# Altium PCB carrier_board.PcbDoc (part 16 of 18)
Units mm, origin at the board's own origin, x right, y up, seen from the top; angles counter-clockwise.
Board outline 146 x 102 mm, 20 copper layers (F.Cu, F.Mask, B.Cu, B.Mask, In1.Cu, F.SilkS, In2.Cu, B.SilkS, F.Adhes, B.Adhes, F.Paste, B.Paste, Dwgs.User, Cmts.User, Eco1.User, Eco2.User, Edge.Cuts, Margin, B.CrtYd, F.CrtYd); 256 components, 384 nets, 1262 pads, 1024 vias.
Unrouted connection lines stored in the file: 117.
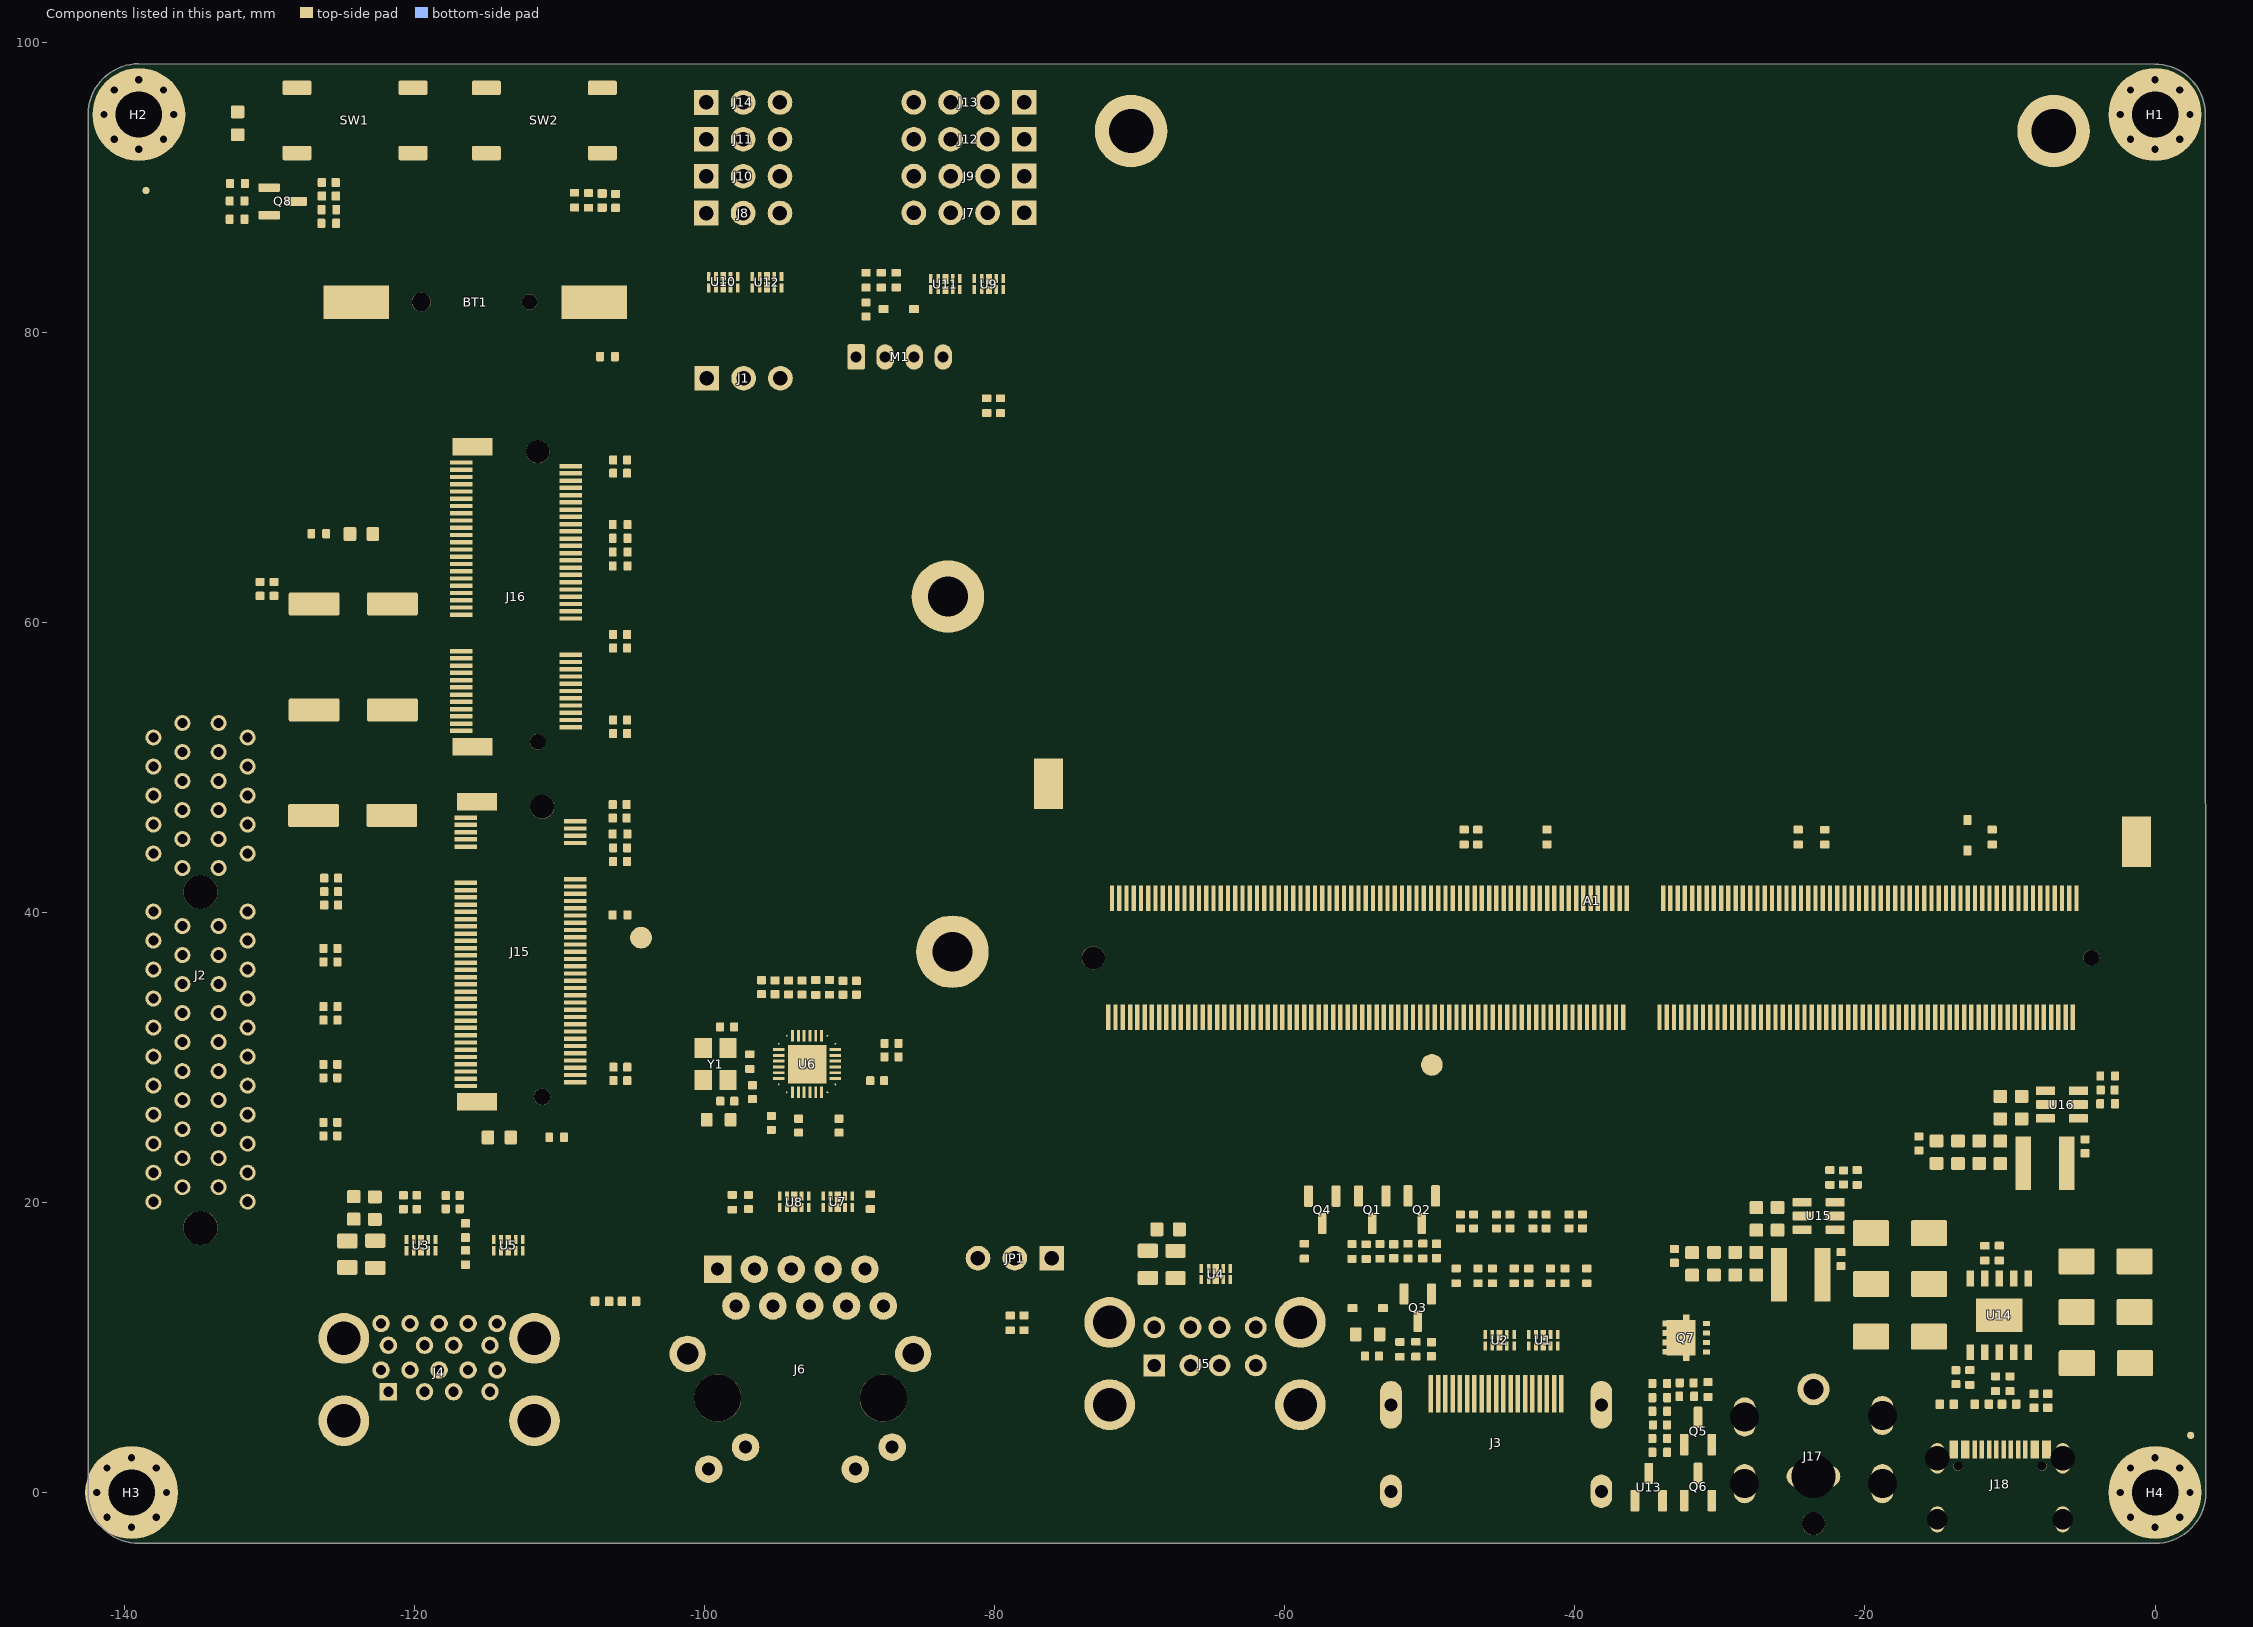
[diagram p26: the components of this part, seen from the top]

## Polygon pours and split planes (outlines as drawn) (continued)
MDI3+ on F.Cu "F.Cu-/Gigabit Ethernet/MDI3+" (solid, remove dead copper, pour order 31023): 25 vertices, not listed, extent -91.005,12.859 -89.425,14.292
CON_USB4_D_N on F.Cu "F.Cu-/USB2.0&USB3.0/CON_USB4_D_N-2" (solid, remove dead copper, pour order 31409): -115.932,17.355 -116.012,17.392 -116.055,17.429 -116.094,17.476 -116.126,17.531 -116.15,17.593 -116.162,17.656 -116.163,17.723 -116.162,17.739 -116.481,17.58 -116.559,17.285 -116.419,17.284 -116.203,17.248 -116.044,17.211 -115.932,17.185
I2C5_SDA on F.Cu "F.Cu-/GPIO/I2C5_SDA" (solid, remove dead copper, pour order 32144): -81.475,83.37 -81.475,83.355 -81.479,83.285 -81.494,83.257 -81.525,83.245 -81.4,82.932 -81.275,83.245 -81.296,83.25 -81.311,83.262 -81.325,83.307 -81.325,83.355 -81.325,83.37
CON_USB4_D_N on F.Cu "F.Cu-/USB2.0&USB3.0/CON_USB4_D_N-1" (solid, remove dead copper, pour order 31410): -117.017,17.185 -116.86,17.219 -116.619,17.269 -116.502,17.285 -116.4,17.285 -116.479,17.58 -116.798,17.736 -116.8,17.615 -116.838,17.505 -116.906,17.416 -116.948,17.383 -116.991,17.362 -117.017,17.355
{\C\L\K\R\E\Q\M\}\ on F.Cu "F.Cu-/M.2 E&M Key/~{CLKREQM}" (solid, remove dead copper, pour order 31583): -106.44,40.41 -106.446,40.325 -106.467,40.224 -106.493,40.159 -106.531,40.103 -106.562,40.075 -106.6,40.057 -106.34,39.819 -106.08,40.057 -106.142,40.096 -106.192,40.171 -106.228,40.287 -106.24,40.41
Net-(J3-+5V) on F.Cu "F.Cu-Net-(J3-+5V)" (solid, remove dead copper, pour order 31312): -49.303,5.355 -49.31,5.396 -49.32,5.468 -49.31,5.495 -49.28,5.505 -49.43,6.806 -49.58,5.505 -49.558,5.5 -49.545,5.488 -49.54,5.445 -49.55,5.396 -49.557,5.355
SUSCLK_WIFI on F.Cu "F.Cu-/LattePanda Module/SUSCLK_WIFI-1" (solid, remove dead copper, pour order 31642): -104.78,45.5 -104.85,45.506 -104.933,45.525 -104.993,45.551 -105.042,45.588 -105.067,45.621 -105.081,45.66 -105.083,45.67 -105.321,45.4 -105.083,45.13 -105.056,45.195 -104.997,45.247 -104.899,45.285 -104.78,45.3
+3V3 on F.Cu "F.Cu-+3V3-21" (solid, remove dead copper, pour order 31362): -106.53,47.09 -106.525,47.01 -106.518,46.914 -106.522,46.816 -106.548,46.73 -106.574,46.696 -106.61,46.67 -106.33,46.499 -106.05,46.67 -106.104,46.717 -106.134,46.793 -106.142,46.908 -106.135,47.01 -106.13,47.09
+3V3 on F.Cu "F.Cu-+3V3-20" (solid, remove dead copper, pour order 31272): -49.785,12.65 -49.78,12.726 -49.762,12.816 -49.735,12.894 -49.697,12.964 -49.662,13.004 -49.62,13.033 -49.596,13.043 -49.885,13.688 -50.174,13.043 -50.106,13.002 -50.049,12.924 -50.005,12.804 -49.985,12.65
GND on F.Cu "F.Cu-GND-44" (solid, remove dead copper, pour order 31875): -12.815,41.995 -12.81,42.07 -12.798,42.125 -12.77,42.192 -12.74,42.256 -12.714,42.352 -12.91,42.392 -13.106,42.352 -13.065,42.216 -13.056,42.195 -13.027,42.115 -13.015,41.995
Net-(U14-VDD) on F.Cu "F.Cu-Net-(U14-VDD)" (solid, remove dead copper, pour order 31478): -13.15,8.565 -13.242,8.568 -13.354,8.584 -13.407,8.6 -13.455,8.624 -13.492,8.656 -13.516,8.699 -13.741,8.43 -13.516,8.161 -13.478,8.224 -13.406,8.272 -13.293,8.304 -13.15,8.315
GND on F.Cu "F.Cu-GND-43" (solid, remove dead copper, pour order 31704): -54.339,15.509 -54.307,15.65 -54.274,15.726 -54.23,15.793 -54.194,15.827 -54.153,15.849 -54.129,15.854 -54.389,16.098 -54.669,15.866 -54.583,15.836 -54.52,15.778 -54.485,15.699 -54.481,15.651
FAN_1_PWM on F.Cu "F.Cu-/Fan_Temp/FAN_1_PWM" (solid, remove dead copper, pour order 31861): -71.369,43.199 -71.311,43.251 -71.262,43.282 -71.198,43.309 -71.134,43.335 -71.049,43.384 -71.159,43.551 -71.326,43.661 -71.391,43.539 -71.401,43.512 -71.435,43.434 -71.511,43.341
GND on F.Cu "F.Cu-GND-42" (solid, remove dead copper, pour order 31306): -105.046,47.066 -105.097,47.011 -105.168,46.934 -105.251,46.862 -105.344,46.813 -105.394,46.805 -105.446,46.81 -105.371,46.499 -105.09,46.377 -105.075,46.46 -105.021,46.549 -104.918,46.652 -104.849,46.71 -104.764,46.784
+BATT on F.Cu "F.Cu-+BATT-1" (solid, remove dead copper, pour order 31984): -60.543,62.537 -60.498,62.485 -60.471,62.441 -60.445,62.362 -60.425,62.29 -60.376,62.199 -60.209,62.309 -60.099,62.476 -60.209,62.531 -60.262,62.545 -60.342,62.572 -60.386,62.599 -60.437,62.643
DDI_B_TX2+ on F.Cu "F.Cu-/HDMI/DDI_B_TX2+" (solid, remove dead copper, pour order 31453): -44.891,19.683 -44.869,19.612 -44.802,19.37 -44.784,19.248 -44.792,19.142 -44.482,19.169 -44.324,19.45 -44.441,19.463 -44.547,19.511 -44.634,19.588 -44.665,19.635 -44.685,19.68 -44.686,19.683
HSIO_10_TX- on F.Cu "F.Cu-/LattePanda Module/HSIO_10_TX-" (solid, remove dead copper, pour order 31900): -59.864,29.651 -59.873,29.486 -59.879,29.385 -59.86,29.241 -59.664,29.279 -59.498,29.391 -59.569,29.473 -59.587,29.488 -59.642,29.548 -59.658,29.59 -59.663,29.651
GND on F.Cu "F.Cu-GND-41" (solid, remove dead copper, pour order 31871): -49.515,40.236 -49.52,40.16 -49.532,40.105 -49.56,40.039 -49.59,39.974 -49.616,39.879 -49.42,39.839 -49.224,39.879 -49.265,40.015 -49.274,40.036 -49.303,40.115 -49.315,40.236
Net-(U13-REF) on F.Cu "F.Cu-Net-(U13-REF)-1" (solid, remove dead copper, pour order 31569): -33.54,2.183 -33.534,2.267 -33.513,2.368 -33.487,2.434 -33.449,2.489 -33.418,2.517 -33.38,2.536 -33.64,2.773 -33.9,2.536 -33.838,2.497 -33.788,2.422 -33.752,2.306 -33.74,2.183
+3V3 on F.Cu "F.Cu-+3V3-19" (solid, remove dead copper, pour order 31811): -124.986,87.38 -124.908,87.375 -124.852,87.363 -124.787,87.337 -124.723,87.309 -124.629,87.284 -124.589,87.48 -124.629,87.676 -124.761,87.635 -124.787,87.623 -124.866,87.593 -124.986,87.58
CON_PCIE_TX_0- on F.Cu "F.Cu-/M.2 E&M Key/CON_PCIE_TX_0-" (solid, remove dead copper, pour order 31527): -106.803,58.736 -106.621,58.8 -106.512,58.828 -106.403,58.846 -106.328,58.849 -106.262,58.84 -106.299,59.15 -106.58,59.301 -106.593,59.178 -106.641,59.06 -106.721,58.961 -106.803,58.906
Net-(D10-A2) on F.Cu "F.Cu-Net-(D10-A2)-2" (solid, remove dead copper, pour order 31429): -11.34,5.475 -11.334,5.56 -11.314,5.662 -11.288,5.737 -11.251,5.801 -11.217,5.835 -11.177,5.859 -11.171,5.861 -11.455,6.091 -11.739,5.861 -11.668,5.82 -11.608,5.743 -11.562,5.626 -11.54,5.487 -11.54,5.475
GND on F.Cu "F.Cu-GND-40" (solid, remove dead copper, pour order 31746): -116.156,63.41 -116.073,63.405 -116.013,63.393 -115.954,63.371 -115.89,63.347 -115.799,63.324 -115.759,63.52 -115.799,63.716 -115.924,63.676 -115.96,63.658 -116.037,63.624 -116.156,63.61
{\W\A\K\E\}\ on F.Cu "F.Cu-/~{WAKE}" (solid, remove dead copper, pour order 31775): -46.565,34.174 -46.56,34.255 -46.548,34.312 -46.524,34.374 -46.498,34.438 -46.474,34.531 -46.67,34.571 -46.866,34.531 -46.826,34.403 -46.81,34.371 -46.779,34.293 -46.765,34.174
GND on F.Cu "F.Cu-GND-39" (solid, remove dead copper, pour order 31796): -24.815,41.994 -24.81,42.075 -24.798,42.132 -24.774,42.194 -24.748,42.258 -24.724,42.351 -24.92,42.391 -25.116,42.351 -25.076,42.223 -25.06,42.191 -25.029,42.113 -25.015,41.994
GND on F.Cu "F.Cu-GND-38" (solid, remove dead copper, pour order 31691): -96.175,35.82 -96.181,35.761 -96.199,35.692 -96.225,35.638 -96.263,35.59 -96.3,35.563 -96.345,35.545 -96.355,35.542 -96.075,35.319 -95.795,35.542 -95.87,35.576 -95.926,35.64 -95.964,35.735 -95.975,35.82
+5V on F.Cu "F.Cu-+5V-2" (solid, remove dead copper, pour order 31191): 19 vertices, not listed, extent -69.275,17.215 -68.449,18.191
+3V3 on F.Cu "F.Cu-+3V3-18" (solid, remove dead copper, pour order 30976): -125.8,40.1 -125.8,48.8 -134.7,48.8 -134.7,47 -138.68,46.99 -138.68,44.09 -130.5,44.1 -129.1,44.1 -129.1,40.1
REFCLK3+ on F.Cu "F.Cu-/LattePanda Module/REFCLK3+" (solid, remove dead copper, pour order 31484): -115.845,64.209 -116.153,64.188 -116.444,64.163 -116.78,64.16 -116.771,64.01 -115.995,63.954 -115.99,63.982 -115.978,64.003 -115.932,64.03 -115.846,64.039 -115.845,64.039
Net-(D21-A2) on F.Cu "F.Cu-Net-(D21-A2)-1" (solid, remove dead copper, pour order 31699): -126.52,90.814 -126.514,90.729 -126.524,90.676 -126.547,90.623 -126.576,90.584 -126.615,90.553 -126.657,90.534 -126.387,90.309 -126.149,90.579 -126.214,90.609 -126.289,90.684 -126.37,90.815 -126.414,90.92
GND on F.Cu "F.Cu-GND-37" (solid, remove dead copper, pour order 31577): -25.194,45.6 -25.109,45.594 -25.008,45.573 -24.943,45.547 -24.887,45.509 -24.859,45.478 -24.841,45.44 -24.603,45.7 -24.841,45.96 -24.88,45.898 -24.955,45.848 -25.071,45.812 -25.194,45.8
TMDS_D2- on F.Cu "F.Cu-/HDMI/TMDS_D2-" (solid, remove dead copper, pour order 32078): -41.783,10.547 -41.778,10.515 -41.77,10.454 -41.78,10.431 -41.805,10.422 -41.68,10.109 -41.555,10.422 -41.575,10.427 -41.586,10.44 -41.589,10.482 -41.582,10.515 -41.577,10.547
CON_USB4_D_P on F.Cu "F.Cu-/USB2.0&USB3.0/CON_USB4_D_P-1" (solid, remove dead copper, pour order 31918): -115.903,16.913 -115.852,16.908 -115.815,16.895 -115.769,16.851 -115.752,16.826 -115.714,16.772 -115.651,16.717 -115.539,16.883 -115.501,17.079 -115.606,17.095 -115.68,17.097 -115.741,17.092 -115.903,17.083
+3V3 on F.Cu "F.Cu-+3V3-17" (solid, remove dead copper, pour order 31619): -107.995,45.905 -108.035,45.898 -108.108,45.889 -108.134,45.9 -108.145,45.93 -108.921,45.78 -108.145,45.63 -108.14,45.652 -108.128,45.665 -108.085,45.671 -108.035,45.662 -107.995,45.655
+BATT on F.Cu "F.Cu-+BATT" (solid, remove dead copper, pour order 31511): -105.686,77.922 -105.789,78.054 -105.839,78.143 -105.88,78.24 -105.902,78.319 -105.91,78.398 -105.91,78.422 -106.181,78.311 -106.242,77.99 -106.143,77.993 -106.02,77.961 -105.882,77.888 -105.792,77.816
Net-(U6-CKXTAL2) on F.Cu "F.Cu-Net-(U6-CKXTAL2)-1" (solid, remove dead copper, pour order 31555): -96.338,29.511 -96.574,29.491 -96.767,29.471 -96.937,29.47 -96.881,29.2 -96.564,29.044 -96.558,29.153 -96.518,29.247 -96.448,29.32 -96.406,29.345 -96.364,29.359 -96.338,29.361
GND on F.Cu "F.Cu-GND-36" (solid, remove dead copper, pour order 31433): 42 vertices, not listed, extent -83.879,92.8 -82.551,93.8
GND on F.Cu "F.Cu-GND-35" (solid, remove dead copper, pour order 31807): -54.565,33.794 -54.56,33.875 -54.548,33.932 -54.524,33.994 -54.498,34.058 -54.474,34.151 -54.67,34.191 -54.866,34.151 -54.826,34.023 -54.81,33.991 -54.779,33.913 -54.765,33.794
REFCLK0+ on F.Cu "F.Cu-/LattePanda Module/REFCLK0+" (solid, remove dead copper, pour order 31973): -49.737,38.725 -49.616,38.833 -49.543,38.899 -49.456,39.011 -49.622,39.123 -49.819,39.161 -49.822,39.064 -49.813,39.013 -49.805,38.972 -49.806,38.932 -49.821,38.891 -49.858,38.845
GND on F.Cu "F.Cu-GND-34" (solid, remove dead copper, pour order 31709): -95.325,24.51 -95.304,24.606 -95.278,24.659 -95.24,24.706 -95.201,24.736 -95.155,24.756 -95.131,24.761 -95.4,25.001 -95.669,24.761 -95.592,24.731 -95.529,24.669 -95.486,24.578 -95.475,24.51
HSIO_1_TX+ on F.Cu "F.Cu-/LattePanda Module/HSIO_1_TX+" (solid, remove dead copper, pour order 31536): -116.375,20.241 -116.457,20.293 -116.5,20.338 -116.539,20.394 -116.569,20.455 -116.59,20.524 -116.6,20.633 -116.881,20.48 -116.916,20.17 -116.809,20.179 -116.649,20.156 -116.436,20.093 -116.375,20.071
CON_USB2_D_P on F.Cu "F.Cu-/USB2.0&USB3.0/CON_USB2_D_P" (solid, remove dead copper, pour order 32065): -65.449,15.118 -65.433,15.004 -65.417,14.937 -65.387,14.802 -65.375,14.663 -65.25,14.679 -65.202,14.992 -65.231,14.997 -65.252,15.01 -65.274,15.052 -65.279,15.112 -65.279,15.118
PCIE30_TX2_P on F.Cu "F.Cu-/PCIe x4/PCIE30_TX2_P" (solid, remove dead copper, pour order 31524): -126.779,29.104 -126.733,29.119 -126.484,29.189 -126.353,29.21 -126.241,29.207 -126.279,29.517 -126.56,29.668 -126.569,29.542 -126.614,29.425 -126.688,29.33 -126.732,29.297 -126.776,29.276 -126.779,29.275
Net-(U13-K) on F.Cu "F.Cu-Net-(U13-K)" (solid, remove dead copper, pour order 31397): -35.012,6.011 -34.942,6.077 -34.852,6.148 -34.748,6.205 -34.694,6.222 -34.639,6.227 -34.598,6.222 -34.659,6.543 -34.93,6.654 -34.943,6.552 -34.994,6.434 -35.09,6.3 -35.191,6.191
GND on F.Cu "F.Cu-GND-33" (solid, remove dead copper, pour order 31611): -52.69,17.588 -52.676,17.551 -52.669,17.504 -52.673,17.456 -52.689,17.409 -52.713,17.376 -52.749,17.348 -52.799,17.326 -52.489,17.122 -52.253,17.401 -52.316,17.424 -52.393,17.492 -52.485,17.619 -52.548,17.73
TMDS_CK+ on F.Cu "F.Cu-/HDMI/TMDS_CK+-1" (solid, remove dead copper, pour order 31446): -47.163,14.812 -47.112,14.754 -47.06,14.677 -47.023,14.602 -46.999,14.522 -46.993,14.463 -46.999,14.405 -47.005,14.383 -46.684,14.429 -46.564,14.7 -46.665,14.716 -46.788,14.773 -46.93,14.877 -47.017,14.958
SOC_UART2_RX on F.Cu "F.Cu-/GPIO/SOC_UART2_RX" (solid, remove dead copper, pour order 32125): -98.285,83.493 -98.285,83.477 -98.289,83.407 -98.304,83.379 -98.335,83.367 -98.21,83.054 -98.085,83.367 -98.106,83.372 -98.121,83.385 -98.135,83.43 -98.135,83.477 -98.135,83.493
CON_USB4_SSRX_N on F.Cu "F.Cu-/USB2.0&USB3.0/CON_USB4_SSRX_N-1" (solid, remove dead copper, pour order 32028): -112.559,16.232 -112.559,16.238 -112.55,16.312 -112.527,16.344 -112.482,16.358 -112.53,16.671 -112.655,16.687 -112.667,16.548 -112.697,16.413 -112.719,16.316 -112.729,16.232
{\P\L\T\_\R\S\T\}\ on F.Cu "F.Cu-/~{PLT_RST}" (solid, remove dead copper, pour order 31866): -111.611,64.611 -111.669,64.559 -111.718,64.528 -111.782,64.501 -111.846,64.475 -111.931,64.426 -111.821,64.259 -111.654,64.149 -111.589,64.271 -111.579,64.298 -111.545,64.376 -111.469,64.469
Net-(A1-SIO_UART_RX) on F.Cu "F.Cu-Net-(A1-SIO_UART_RX)" (solid, remove dead copper, pour order 31856): -72.574,45.3 -72.652,45.305 -72.708,45.317 -72.773,45.343 -72.837,45.371 -72.931,45.396 -72.971,45.2 -72.931,45.004 -72.799,45.045 -72.773,45.057 -72.694,45.087 -72.574,45.1
TMDS_D2+ on F.Cu "F.Cu-/HDMI/TMDS_D2+-1" (solid, remove dead copper, pour order 31447): -39.663,14.812 -39.612,14.754 -39.56,14.677 -39.523,14.602 -39.499,14.522 -39.493,14.463 -39.499,14.405 -39.505,14.383 -39.184,14.429 -39.064,14.7 -39.165,14.716 -39.288,14.773 -39.43,14.877 -39.517,14.958
Net-(J6-CT) on F.Cu "F.Cu-Net-(J6-CT)" (solid, remove dead copper, pour order 31008): 27 vertices, not listed, extent -100.055,15.399 -98.155,16.85
GND on F.Cu "F.Cu-GND-32" (solid, remove dead copper, pour order 31879): -116.176,64.91 -116.103,64.905 -116.049,64.893 -115.98,64.862 -115.915,64.831 -115.819,64.804 -115.779,65 -115.819,65.196 -115.959,65.155 -115.974,65.149 -116.054,65.121 -116.176,65.11
Net-(Q8-G) on F.Cu "F.Cu-Net-(Q8-G)" (solid, remove dead copper, pour order 31507): -132.352,88.274 -132.472,88.184 -132.553,88.141 -132.64,88.109 -132.709,88.096 -132.775,88.096 -132.802,88.1 -132.741,87.779 -132.47,87.668 -132.458,87.787 -132.407,87.931 -132.315,88.086 -132.246,88.168
HPD on F.Cu "F.Cu-/HDMI/HPD" (solid, remove dead copper, pour order 31726): -53.329,15.652 -53.264,15.581 -53.226,15.525 -53.202,15.479 -53.126,15.349 -52.959,15.459 -52.849,15.626 -52.979,15.702 -53.056,15.746 -53.152,15.829
Net-(U6-LANWAKEB) on F.Cu "F.Cu-Net-(U6-LANWAKEB)" (solid, remove dead copper, pour order 32155): -93.21,31.99 -93.207,31.958 -93.205,31.89 -93.214,31.861 -93.235,31.84 -93.135,31.489 -93.035,31.84 -93.061,31.872 -93.065,31.932 -93.063,31.958 -93.06,31.99
GND on F.Cu "F.Cu-GND-31" (solid, remove dead copper, pour order 31851): -107.824,13.28 -107.902,13.285 -107.958,13.297 -108.023,13.323 -108.087,13.351 -108.181,13.376 -108.221,13.18 -108.181,12.984 -108.049,13.025 -108.023,13.037 -107.944,13.067 -107.824,13.08
GbE_PCIe_CLK+ on F.Cu "F.Cu-/Gigabit Ethernet/GbE_PCIe_CLK+" (solid, remove dead copper, pour order 31905): -65.543,38.199 -65.492,38.194 -65.455,38.181 -65.409,38.137 -65.392,38.112 -65.354,38.058 -65.291,38.003 -65.179,38.169 -65.141,38.365 -65.246,38.381 -65.32,38.383 -65.381,38.378 -65.543,38.369
GND on F.Cu "F.Cu-GND-30" (solid, remove dead copper, pour order 31700): -93.552,24.232 -93.477,24.382 -93.424,24.455 -93.364,24.514 -93.321,24.541 -93.278,24.553 -93.519,24.811 -93.819,24.616 -93.737,24.574 -93.68,24.505 -93.652,24.417 -93.658,24.338
REFCLK3- on F.Cu "F.Cu-/LattePanda Module/REFCLK3-" (solid, remove dead copper, pour order 31489): -115.845,64.481 -115.846,64.481 -115.887,64.483 -115.937,64.492 -115.978,64.517 -115.99,64.538 -115.995,64.566 -116.771,64.51 -116.78,64.36 -116.463,64.358 -116.153,64.332 -115.845,64.311
GND on F.Cu "F.Cu-GND-29" (solid, remove dead copper, pour order 31823): -43.171,39.509 -43.119,39.451 -43.088,39.402 -43.061,39.338 -43.035,39.274 -42.986,39.189 -42.819,39.299 -42.709,39.466 -42.831,39.531 -42.858,39.541 -42.936,39.575 -43.029,39.651
Net-(U6-ISOLATEB) on F.Cu "F.Cu-Net-(U6-ISOLATEB)" (solid, remove dead copper, pour order 32153): -92.81,31.99 -92.807,31.958 -92.805,31.89 -92.814,31.861 -92.835,31.84 -92.735,31.489 -92.635,31.84 -92.661,31.872 -92.665,31.932 -92.663,31.958 -92.66,31.99
CON_USB1_D_P on F.Cu "F.Cu-/USB2.0&USB3.0/CON_USB1_D_P-1" (solid, remove dead copper, pour order 32023): -63.779,15.017 -63.779,15.023 -63.77,15.097 -63.747,15.129 -63.702,15.142 -63.75,15.456 -63.875,15.472 -63.887,15.333 -63.917,15.198 -63.939,15.101 -63.949,15.017
PCIE30_TX0_N on F.Cu "F.Cu-/PCIe x4/PCIE30_TX0_N" (solid, remove dead copper, pour order 31232): 17 vertices, not listed, extent -136.968,36.593 -135.999,37.507
GND on F.Cu "F.Cu-GND-28" (solid, remove dead copper, pour order 31761): -13.015,39.926 -13.02,39.846 -13.032,39.788 -13.056,39.726 -13.082,39.662 -13.106,39.569 -12.91,39.529 -12.714,39.569 -12.754,39.697 -12.77,39.729 -12.801,39.807 -12.815,39.926
I2C3_SCL on F.Cu "F.Cu-/GPIO/I2C3_SCL-1" (solid, remove dead copper, pour order 32121): -82.825,82.495 -82.825,82.51 -82.821,82.58 -82.806,82.608 -82.775,82.62 -82.9,82.933 -83.025,82.62 -83.004,82.615 -82.989,82.603 -82.975,82.558 -82.975,82.51 -82.975,82.495
TMDS_D1- on F.Cu "F.Cu-/HDMI/TMDS_D1--1" (solid, remove dead copper, pour order 32076): -43.077,9.673 -43.082,9.705 -43.09,9.766 -43.08,9.789 -43.055,9.797 -43.18,10.111 -43.305,9.797 -43.285,9.793 -43.274,9.78 -43.271,9.738 -43.278,9.705 -43.283,9.673
+1V0 on F.Cu "F.Cu-+1V0-3" (solid, remove dead copper, pour order 31606): -95.735,34.285 -95.608,34.264 -95.534,34.237 -95.464,34.198 -95.418,34.161 -95.384,34.116 -95.369,34.08 -95.144,34.35 -95.369,34.619 -95.409,34.554 -95.489,34.497 -95.612,34.452 -95.735,34.435
GND on F.Cu "F.Cu-GND-27" (solid, remove dead copper, pour order 31348): -45.83,5.355 -45.832,5.381 -45.831,5.461 -45.815,5.492 -45.78,5.505 -45.93,6.806 -46.08,5.505 -46.057,5.5 -46.041,5.488 -46.027,5.443 -46.028,5.381 -46.03,5.355
GND on F.Cu "F.Cu-GND-26" (solid, remove dead copper, pour order 31779): -38.565,33.794 -38.56,33.875 -38.548,33.932 -38.524,33.994 -38.498,34.058 -38.474,34.151 -38.67,34.191 -38.866,34.151 -38.826,34.023 -38.81,33.991 -38.779,33.913 -38.765,33.794
GND on F.Cu "F.Cu-GND-25" (solid, remove dead copper, pour order 30988): -44.065,33.794 -44.06,33.875 -44.048,33.932 -44.024,33.994 -43.998,34.058 -43.974,34.151 -44.17,34.191 -44.366,34.151 -44.326,34.023 -44.31,33.991 -44.279,33.913 -44.265,33.794
HSIO_8_TX- on F.Cu "F.Cu-/LattePanda Module/HSIO_8_TX--1" (solid, remove dead copper, pour order 31533): -124.807,36.994 -124.989,36.93 -125.098,36.902 -125.207,36.884 -125.282,36.881 -125.348,36.89 -125.311,36.58 -125.03,36.429 -125.017,36.552 -124.969,36.67 -124.889,36.769 -124.807,36.824
DDI_B_TX0- on F.Cu "F.Cu-/HDMI/DDI_B_TX0-" (solid, remove dead copper, pour order 31466): -40.191,19.683 -40.238,19.595 -40.279,19.55 -40.331,19.51 -40.387,19.48 -40.451,19.459 -40.553,19.45 -40.395,19.169 -40.085,19.142 -40.093,19.243 -40.069,19.399 -40.008,19.612 -39.986,19.683
CON_USB3_SSRX_P on F.Cu "F.Cu-/USB2.0&USB3.0/CON_USB3_SSRX_P-2" (solid, remove dead copper, pour order 32036): -114.501,17.107 -114.501,17.102 -114.51,17.028 -114.533,16.996 -114.578,16.983 -114.53,16.669 -114.405,16.653 -114.393,16.792 -114.363,16.927 -114.341,17.024 -114.331,17.107
GND on F.Cu "F.Cu-GND-24" (solid, remove dead copper, pour order 31471): -104.135,13.28 -104.204,13.285 -104.287,13.303 -104.36,13.329 -104.425,13.368 -104.463,13.403 -104.49,13.445 -104.5,13.475 -104.726,13.18 -104.5,12.885 -104.465,12.955 -104.394,13.013 -104.283,13.058 -104.148,13.08 -104.135,13.08
+3V3 on F.Cu "F.Cu-+3V3-16" (solid, remove dead copper, pour order 31623): -108.295,70.385 -108.335,70.378 -108.408,70.369 -108.434,70.38 -108.445,70.41 -109.221,70.26 -108.445,70.11 -108.44,70.132 -108.428,70.145 -108.385,70.151 -108.335,70.142 -108.295,70.135
I2C4_SCL on F.Cu "F.Cu-/GPIO/I2C4_SCL" (solid, remove dead copper, pour order 32142): -83.975,83.37 -83.975,83.355 -83.979,83.285 -83.994,83.257 -84.025,83.245 -83.9,82.932 -83.775,83.245 -83.796,83.25 -83.811,83.262 -83.825,83.307 -83.825,83.355 -83.825,83.37
SOC_UART1_RX on F.Cu "F.Cu-/GPIO/SOC_UART1_RX-1" (solid, remove dead copper, pour order 32001): -99.285,82.486 -99.29,82.418 -99.302,82.367 -99.34,82.293 -99.376,82.228 -99.406,82.129 -99.21,82.089 -99.014,82.129 -99.053,82.245 -99.08,82.293 -99.119,82.368 -99.131,82.419 -99.135,82.486
Net-(U14-CFG1) on F.Cu "F.Cu-Net-(U14-CFG1)" (solid, remove dead copper, pour order 31378): -11.865,15.575 -11.867,15.505 -11.882,15.421 -11.898,15.382 -11.921,15.35 -11.953,15.328 -11.995,15.32 -11.74,14.769 -11.485,15.32 -11.518,15.325 -11.545,15.338 -11.585,15.387 -11.609,15.473 -11.615,15.575
Net-(Q7-G) on F.Cu "F.Cu-Net-(Q7-G)-2" (solid, remove dead copper, pour order 31500): -31.25,7.689 -31.383,7.7 -31.458,7.718 -31.525,7.751 -31.557,7.781 -31.58,7.818 -31.587,7.842 -31.811,7.562 -31.587,7.283 -31.556,7.346 -31.492,7.393 -31.389,7.424 -31.25,7.435
+3V3 on F.Cu "F.Cu-+3V3-15" (solid, remove dead copper, pour order 31725): -2.566,28.595 -2.47,28.59 -2.404,28.578 -2.355,28.563 -2.209,28.524 -2.169,28.72 -2.209,28.916 -2.355,28.877 -2.44,28.854 -2.566,28.845
+1V0 on F.Cu "F.Cu-+1V0-2" (solid, remove dead copper, pour order 31701): -93.245,33.726 -93.215,33.848 -93.181,33.926 -93.135,33.999 -93.094,34.046 -93.047,34.079 -93.004,34.093 -93.274,34.33 -93.544,34.091 -93.467,34.061 -93.404,33.998 -93.36,33.906 -93.351,33.832
CON_USB1_D_P on F.Cu "F.Cu-/USB2.0&USB3.0/CON_USB1_D_P" (solid, remove dead copper, pour order 32055): -63.949,15.118 -63.933,15.004 -63.917,14.937 -63.887,14.802 -63.875,14.663 -63.75,14.679 -63.702,14.992 -63.731,14.997 -63.752,15.01 -63.774,15.052 -63.779,15.112 -63.779,15.118
GND on F.Cu "F.Cu-GND-23" (solid, remove dead copper, pour order 32009): -48.83,8.768 -48.835,8.888 -48.849,8.968 -48.858,9.007 -48.889,9.139 -49.085,9.101 -49.196,8.934 -49.119,8.892 -49.082,8.874 -49.054,8.852 -49.036,8.819 -49.03,8.768
CON_USB4_SSTX_P on F.Cu "F.Cu-/USB2.0&USB3.0/CON_USB4_SSTX_P" (solid, remove dead copper, pour order 31514): -118.345,20.071 -118.122,20.143 -117.991,20.171 -117.868,20.179 -117.804,20.17 -117.839,20.48 -118.12,20.633 -118.133,20.51 -118.181,20.393 -118.26,20.296 -118.345,20.241
GND on F.Cu "F.Cu-GND-22" (solid, remove dead copper, pour order 31589): -64.55,14.843 -64.563,14.907 -64.577,14.962 -64.582,15.014 -64.568,15.052 -64.551,15.064 -64.525,15.068 -64.75,15.418 -64.975,15.068 -64.947,15.063 -64.929,15.05 -64.918,15.007 -64.937,14.907 -64.95,14.843
+15V on F.Cu "F.Cu-+15V-1" (solid, remove dead copper, pour order 31821): -9.361,16.719 -9.309,16.661 -9.278,16.612 -9.251,16.548 -9.225,16.484 -9.176,16.399 -9.009,16.509 -8.899,16.676 -9.021,16.741 -9.048,16.751 -9.126,16.785 -9.219,16.861
+3V3 on F.Cu "F.Cu-+3V3-14" (solid, remove dead copper, pour order 31832): -88.68,27.939 -88.685,27.861 -88.697,27.805 -88.723,27.74 -88.751,27.676 -88.776,27.582 -88.58,27.542 -88.384,27.582 -88.425,27.713 -88.437,27.74 -88.467,27.819 -88.48,27.939
+1V0 on F.Cu "F.Cu-+1V0-1" (solid, remove dead copper, pour order 31562): -96.483,28.628 -96.512,28.599 -96.676,28.445 -96.768,28.384 -96.812,28.366 -96.855,28.36 -96.696,28.079 -96.385,28.054 -96.43,28.146 -96.441,28.25 -96.417,28.363 -96.36,28.466 -96.342,28.487
GND on F.Cu "F.Cu-GND-21" (solid, remove dead copper, pour order 31648): -117.695,61.91 -117.669,61.912 -117.589,61.911 -117.558,61.895 -117.545,61.86 -116.769,62.01 -117.545,62.16 -117.55,62.137 -117.562,62.121 -117.607,62.107 -117.669,62.108 -117.695,62.11
USB_2_P7- on F.Cu "F.Cu-/LattePanda Module/USB_2_P7-" (solid, remove dead copper, pour order 31962): -115.373,53.311 -115.211,53.302 -115.112,53.296 -114.971,53.315 -115.009,53.511 -115.121,53.677 -115.193,53.611 -115.222,53.568 -115.246,53.534 -115.274,53.506 -115.314,53.488 -115.373,53.481
Net-(U12-NC-Pad6) on F.Cu "F.Cu-Net-(U12-NC-Pad6)" (solid, remove dead copper, pour order 32108): -94.8,83.49 -94.795,83.459 -94.79,83.397 -94.799,83.374 -94.825,83.365 -94.7,83.052 -94.575,83.365 -94.595,83.37 -94.606,83.382 -94.61,83.425 -94.605,83.459 -94.6,83.49
CON_USB4_D_N on F.Cu "F.Cu-/USB2.0&USB3.0/CON_USB4_D_N" (solid, remove dead copper, pour order 31935): -82.807,19.321 -82.858,19.326 -82.895,19.339 -82.941,19.383 -82.958,19.408 -82.996,19.462 -83.059,19.517 -83.171,19.351 -83.209,19.155 -83.104,19.139 -83.03,19.137 -82.969,19.142 -82.807,19.151
I2C5_SCL on F.Cu "F.Cu-/GPIO/I2C5_SCL" (solid, remove dead copper, pour order 32146): -84.475,84.145 -84.475,84.13 -84.479,84.06 -84.494,84.032 -84.525,84.02 -84.4,83.707 -84.275,84.02 -84.296,84.025 -84.311,84.037 -84.325,84.082 -84.325,84.13 -84.325,84.145
GND on F.Cu "F.Cu-GND-20" (solid, remove dead copper, pour order 31248): -4.27,26.509 -4.35,26.566 -4.411,26.601 -4.553,26.69 -4.602,26.738 -4.62,26.786 -5.283,26.748 -5.344,26.447 -5.151,26.464 -4.966,26.443 -4.793,26.387 -4.64,26.3 -4.553,26.226
I2C3_SDA on F.Cu "F.Cu-/GPIO/I2C3_SDA" (solid, remove dead copper, pour order 32130): -79.825,82.495 -79.825,82.51 -79.821,82.58 -79.806,82.608 -79.775,82.62 -79.9,82.933 -80.025,82.62 -80.004,82.615 -79.989,82.603 -79.975,82.558 -79.975,82.51 -79.975,82.495
+12V on F.Cu "F.Cu-+12V" (solid, remove dead copper, pour order 31560): -32.7,6.973 -32.695,7.04 -32.678,7.119 -32.651,7.191 -32.612,7.257 -32.576,7.297 -32.532,7.326 -32.501,7.338 -32.77,7.564 -33.039,7.339 -32.984,7.3 -32.94,7.222 -32.909,7.099 -32.9,6.973
VPullup on F.Cu "F.Cu-VPullup" (solid, remove dead copper, pour order 31831): -40.94,45.086 -40.945,45.008 -40.957,44.952 -40.983,44.887 -41.011,44.823 -41.036,44.729 -40.84,44.689 -40.644,44.729 -40.685,44.861 -40.697,44.887 -40.727,44.966 -40.74,45.086
Net-(D10-A2) on F.Cu "F.Cu-Net-(D10-A2)-1" (solid, remove dead copper, pour order 31603): -11.406,6.726 -11.455,6.63 -11.525,6.518 -11.607,6.422 -11.651,6.39 -11.697,6.374 -11.456,6.089 -11.171,6.319 -11.21,6.336 -11.24,6.36 -11.277,6.422 -11.285,6.503 -11.264,6.584
Net-(J16-{\W\_\D\I\S\A\B\L\E\2\}\)\ on F.Cu "F.Cu-Net-(J16-~{W_DISABLE2})" (solid, remove dead copper, pour order 31630): -106.87,65.66 -106.787,65.654 -106.688,65.631 -106.632,65.605 -106.587,65.569 -106.568,65.541 -106.557,65.507 -106.329,65.79 -106.576,66.047 -106.6,65.976 -106.658,65.921 -106.751,65.879 -106.87,65.86
GND on F.Cu "F.Cu-GND-19" (solid, remove dead copper, pour order 31843): -115.2,70.614 -115.195,70.692 -115.183,70.748 -115.157,70.813 -115.129,70.877 -115.104,70.971 -115.3,71.011 -115.496,70.971 -115.455,70.839 -115.443,70.813 -115.413,70.734 -115.4,70.614
Net-(U15-FB) on F.Cu "F.Cu-Net-(U15-FB)-1" (solid, remove dead copper, pour order 31292): 17 vertices, not listed, extent -22.187,20.014 -21.409,20.669
GND on F.Cu "F.Cu-GND-18" (solid, remove dead copper, pour order 31666): -115.845,65.11 -115.871,65.108 -115.951,65.109 -115.982,65.125 -115.995,65.16 -116.771,65.01 -115.995,64.86 -115.99,64.883 -115.978,64.899 -115.933,64.913 -115.871,64.912 -115.845,64.91
Net-(U6-CKXTAL2) on F.Cu "F.Cu-Net-(U6-CKXTAL2)" (solid, remove dead copper, pour order 31605): -98.03,27.57 -98.051,27.438 -98.078,27.362 -98.116,27.291 -98.153,27.248 -98.197,27.215 -98.224,27.203 -97.955,26.979 -97.686,27.203 -97.753,27.244 -97.814,27.324 -97.861,27.445 -97.88,27.57
GND on F.Cu "F.Cu-GND-17" (solid, remove dead copper, pour order 31665): -117.395,29.93 -117.369,29.932 -117.289,29.931 -117.258,29.915 -117.245,29.88 -116.469,30.03 -117.245,30.18 -117.25,30.157 -117.262,30.141 -117.307,30.127 -117.369,30.128 -117.395,30.13
Net-(U13-REF) on F.Cu "F.Cu-Net-(U13-REF)" (solid, remove dead copper, pour order 31571): -33.74,3.363 -33.746,3.278 -33.767,3.177 -33.793,3.111 -33.831,3.056 -33.862,3.028 -33.9,3.009 -33.64,2.772 -33.38,3.009 -33.442,3.048 -33.492,3.123 -33.528,3.239 -33.54,3.363
+3V3 on F.Cu "F.Cu-+3V3-13" (solid, remove dead copper, pour order 31506): -106.86,70.135 -106.719,70.124 -106.64,70.104 -106.572,70.068 -106.541,70.038 -106.521,70.001 -106.517,69.986 -106.299,70.27 -106.529,70.546 -106.559,70.48 -106.621,70.432 -106.722,70.398 -106.86,70.385
Net-(Q4-D) on F.Cu "F.Cu-Net-(Q4-D)-1" (solid, remove dead copper, pour order 31731): -41.287,15.539 -41.309,15.533 -41.332,15.538 -41.383,15.579 -41.437,15.679 -41.448,15.71 -41.685,15.449 -41.4,15.226 -41.371,15.295 -41.29,15.389 -41.152,15.498 -41.081,15.539
MDI2- on F.Cu "F.Cu-/Gigabit Ethernet/MDI2--1" (solid, remove dead copper, pour order 31086): 20 vertices, not listed, extent -92.417,14.262 -91.3,15.4
+3V3 on F.Cu "F.Cu-+3V3-12" (solid, remove dead copper, pour order 31558): -88.48,27.8 -88.474,27.881 -88.454,27.977 -88.428,28.048 -88.391,28.109 -88.357,28.142 -88.316,28.164 -88.311,28.166 -88.58,28.391 -88.849,28.166 -88.785,28.127 -88.733,28.051 -88.695,27.933 -88.68,27.8
CON_USB3_D_P on F.Cu "F.Cu-/USB2.0&USB3.0/CON_USB3_D_P-1" (solid, remove dead copper, pour order 31969): -106.191,13.967 -106.182,14.129 -106.176,14.228 -106.195,14.369 -106.391,14.331 -106.557,14.219 -106.491,14.147 -106.448,14.118 -106.414,14.094 -106.386,14.066 -106.368,14.026 -106.361,13.967
+15V on F.Cu "F.Cu-+15V" (solid, remove dead copper, pour order 31584): -10.15,17.12 -10.235,17.126 -10.336,17.147 -10.401,17.173 -10.457,17.211 -10.485,17.242 -10.503,17.28 -10.741,17.02 -10.503,16.76 -10.464,16.822 -10.389,16.872 -10.273,16.908 -10.15,16.92
+3V3 on F.Cu "F.Cu-+3V3-11" (solid, remove dead copper, pour order 30971): -9.13,23.12 -15.33,23.13 -16.1,23.58 -18.08,23.57 -18.07,21.39 -9.15,21.39 -9.14,21.38 -9.13,21.39
TMDS_D1+ on F.Cu "F.Cu-/HDMI/TMDS_D1+-2" (solid, remove dead copper, pour order 31330): -42.533,8.255 -42.531,8.227 -42.531,8.148 -42.546,8.117 -42.58,8.105 -42.43,6.804 -42.28,8.105 -42.303,8.11 -42.319,8.122 -42.332,8.167 -42.329,8.227 -42.327,8.255
DDI_B_HPD on F.Cu "F.Cu-/HDMI/DDI_B_HPD-1" (solid, remove dead copper, pour order 31739): -26.544,30.915 -26.624,30.919 -26.682,30.931 -26.744,30.956 -26.808,30.981 -26.901,31.006 -26.941,30.81 -26.901,30.614 -26.766,30.655 -26.744,30.664 -26.665,30.693 -26.544,30.705
CC2 on F.Cu "F.Cu-/PSU/CC2-1" (solid, remove dead copper, pour order 31723): -8.534,5.955 -8.615,5.96 -8.672,5.972 -8.734,5.996 -8.798,6.022 -8.891,6.046 -8.931,5.85 -8.891,5.654 -8.778,5.679 -8.676,5.699 -8.534,5.705
HSIO_10_TX+ on F.Cu "F.Cu-/LattePanda Module/HSIO_10_TX+" (solid, remove dead copper, pour order 31947): -122.763,25.401 -122.601,25.392 -122.502,25.387 -122.361,25.405 -122.399,25.601 -122.511,25.767 -122.583,25.701 -122.612,25.658 -122.636,25.624 -122.664,25.596 -122.704,25.578 -122.763,25.571
GND on F.Cu "F.Cu-GND-16" (solid, remove dead copper, pour order 31745): -108.346,56.66 -108.263,56.655 -108.203,56.643 -108.144,56.621 -108.08,56.597 -107.989,56.574 -107.949,56.77 -107.989,56.966 -108.114,56.926 -108.15,56.908 -108.227,56.874 -108.346,56.86
TMDS_D1+ on F.Cu "F.Cu-/HDMI/TMDS_D1+-1" (solid, remove dead copper, pour order 32093): -42.577,9.673 -42.582,9.705 -42.59,9.766 -42.58,9.789 -42.555,9.797 -42.68,10.111 -42.805,9.797 -42.785,9.793 -42.774,9.78 -42.771,9.738 -42.778,9.705 -42.783,9.673
CON_USB3_D_P on F.Cu "F.Cu-/USB2.0&USB3.0/CON_USB3_D_P" (solid, remove dead copper, pour order 31407): -106.361,13.728 -106.398,13.649 -106.434,13.606 -106.481,13.566 -106.536,13.534 -106.598,13.51 -106.66,13.498 -106.728,13.496 -106.744,13.498 -106.585,13.179 -106.29,13.102 -106.289,13.241 -106.253,13.459 -106.218,13.613 -106.191,13.728
GND on F.Cu "F.Cu-GND-15" (solid, remove dead copper, pour order 31638): -104.78,39.92 -104.85,39.926 -104.933,39.945 -104.993,39.971 -105.042,40.008 -105.067,40.041 -105.081,40.08 -105.083,40.09 -105.321,39.82 -105.083,39.55 -105.056,39.615 -104.997,39.667 -104.899,39.705 -104.78,39.72
HSIO_11_RX- on F.Cu "F.Cu-/LattePanda Module/HSIO_11_RX-" (solid, remove dead copper, pour order 31960): -57.614,36.753 -57.623,36.591 -57.629,36.492 -57.61,36.351 -57.414,36.389 -57.248,36.501 -57.314,36.573 -57.357,36.602 -57.391,36.626 -57.419,36.654 -57.437,36.694 -57.444,36.753
CC2 on F.Cu "F.Cu-/PSU/CC2" (solid, remove dead copper, pour order 31710): -9.065,3.725 -9.058,3.685 -9.049,3.612 -9.06,3.586 -9.09,3.575 -8.94,2.954 -8.79,3.575 -8.812,3.58 -8.825,3.592 -8.831,3.635 -8.822,3.685 -8.815,3.725
SOC_UART1_RX on F.Cu "F.Cu-/GPIO/SOC_UART1_RX" (solid, remove dead copper, pour order 31998): -62.517,75.923 -62.562,75.975 -62.589,76.019 -62.615,76.098 -62.635,76.17 -62.684,76.261 -62.851,76.151 -62.961,75.984 -62.851,75.929 -62.798,75.915 -62.718,75.888 -62.674,75.861 -62.623,75.817
Net-(J16-{\W\_\D\I\S\A\B\L\E\1\}\)\ on F.Cu "F.Cu-Net-(J16-~{W_DISABLE1})" (solid, remove dead copper, pour order 31425): -106.701,66.218 -106.632,66.279 -106.541,66.342 -106.463,66.382 -106.382,66.408 -106.324,66.415 -106.268,66.41 -106.329,66.731 -106.6,66.842 -106.612,66.731 -106.664,66.601 -106.758,66.456 -106.842,66.359
Net-(Q7-G) on F.Cu "F.Cu-Net-(Q7-G)-1" (solid, remove dead copper, pour order 31468): -31.653,6.973 -31.653,6.988 -31.652,7.081 -31.64,7.187 -31.606,7.281 -31.578,7.316 -31.541,7.339 -31.81,7.564 -32.079,7.338 -32.01,7.3 -31.958,7.228 -31.922,7.119 -31.907,6.973
Net-(D22-K) on F.Cu "F.Cu-Net-(D22-K)" (solid, remove dead copper, pour order 31234): 17 vertices, not listed, extent -132.371,92.834 -131.421,93.746
Net-(U16-FB) on F.Cu "F.Cu-Net-(U16-FB)" (solid, remove dead copper, pour order 31566): -3.68,28.13 -3.674,28.215 -3.653,28.316 -3.627,28.381 -3.589,28.437 -3.558,28.465 -3.52,28.483 -3.78,28.721 -4.04,28.483 -3.978,28.444 -3.928,28.369 -3.892,28.253 -3.88,28.13
+3V3 on F.Cu "F.Cu-+3V3-10" (solid, remove dead copper, pour order 31833): -55.46,15.986 -55.465,15.908 -55.477,15.852 -55.503,15.787 -55.531,15.723 -55.556,15.629 -55.36,15.589 -55.164,15.629 -55.205,15.761 -55.217,15.787 -55.247,15.866 -55.26,15.986
SUSCLK_WIFI on F.Cu "F.Cu-/LattePanda Module/SUSCLK_WIFI" (solid, remove dead copper, pour order 32006): -102.949,64.74 -102.833,64.743 -102.739,64.743 -102.609,64.724 -102.569,64.92 -102.681,65.086 -102.773,65.011 -102.84,64.959 -102.885,64.945 -102.949,64.94
GND on F.Cu "F.Cu-GND-14" (solid, remove dead copper, pour order 31390): -35.041,4.969 -35.025,4.952 -34.963,4.888 -34.906,4.806 -34.886,4.758 -34.875,4.704 -34.875,4.645 -34.89,4.58 -34.609,4.662 -34.477,4.972 -34.546,4.99 -34.612,5.044 -34.693,5.16 -34.759,5.251
Net-(Q4-D) on F.Cu "F.Cu-Net-(Q4-D)" (solid, remove dead copper, pour order 31736): -46.289,15.539 -46.148,15.448 -46.07,15.38 -46.007,15.307 -45.982,15.266 -45.97,15.226 -45.685,15.449 -45.922,15.71 -45.949,15.641 -45.98,15.588 -46.01,15.555 -46.041,15.537 -46.083,15.539
I2C4_SDA on F.Cu "F.Cu-/GPIO/I2C4_SDA" (solid, remove dead copper, pour order 32140): -80.825,82.495 -80.825,82.51 -80.821,82.58 -80.806,82.608 -80.775,82.62 -80.9,82.933 -81.025,82.62 -81.004,82.615 -80.989,82.603 -80.975,82.558 -80.975,82.51 -80.975,82.495
I2C2_SDA on F.Cu "F.Cu-/GPIO/I2C2_SDA" (solid, remove dead copper, pour order 31002): 21 vertices, not listed, extent -79.207,86.963 -77.598,88.572
HSI- on F.Cu "F.Cu-/Gigabit Ethernet/HSI-" (solid, remove dead copper, pour order 31520): -88.095,30.55 -87.884,30.619 -87.759,30.648 -87.64,30.659 -87.553,30.65 -87.589,30.96 -87.87,31.112 -87.883,30.989 -87.931,30.872 -88.01,30.774 -88.095,30.72
GND on F.Cu "F.Cu-GND-13" (solid, remove dead copper, pour order 31703): -115.923,69.598 -115.927,69.598 -115.97,69.601 -115.988,69.62 -115.995,69.66 -116.771,69.509 -115.995,69.375 -115.977,69.409 -115.92,69.436 -115.805,69.454 -115.782,69.457
+3V3 on F.Cu "F.Cu-+3V3-9" (solid, remove dead copper, pour order 31658): -107.995,46.38 -108.021,46.378 -108.101,46.379 -108.132,46.395 -108.145,46.43 -108.921,46.28 -108.145,46.13 -108.14,46.153 -108.128,46.169 -108.083,46.183 -108.021,46.182 -107.995,46.18
+3V3 on F.Cu "F.Cu-+3V3-8" (solid, remove dead copper, pour order 31513): -106.86,53.135 -106.738,53.126 -106.667,53.11 -106.602,53.082 -106.564,53.054 -106.536,53.017 -106.523,52.98 -106.299,53.26 -106.523,53.54 -106.554,53.476 -106.618,53.429 -106.722,53.397 -106.86,53.385
+1V0 on F.Cu "F.Cu-+1V0" (solid, remove dead copper, pour order 31865): -96.329,28.499 -96.271,28.551 -96.222,28.582 -96.158,28.609 -96.094,28.635 -96.009,28.684 -96.119,28.851 -96.286,28.961 -96.351,28.839 -96.361,28.812 -96.395,28.734 -96.471,28.641
DDI_B_HPD on F.Cu "F.Cu-/HDMI/DDI_B_HPD" (solid, remove dead copper, pour order 31252): -54.795,19.407 -54.787,19.528 -54.754,19.667 -54.726,19.722 -54.688,19.767 -54.631,19.8 -54.92,20.446 -55.209,19.8 -55.144,19.76 -55.094,19.686 -55.059,19.57 -55.045,19.407
GND on F.Cu "F.Cu-GND-12" (solid, remove dead copper, pour order 31773): -8.515,39.926 -8.52,39.846 -8.532,39.788 -8.556,39.726 -8.582,39.662 -8.606,39.569 -8.41,39.529 -8.214,39.569 -8.254,39.697 -8.27,39.729 -8.301,39.807 -8.315,39.926
MDI1- on F.Cu "F.Cu-/Gigabit Ethernet/MDI1--1" (solid, remove dead copper, pour order 31074): 20 vertices, not listed, extent -94.957,14.272 -93.84,15.4
TMDS_D1+ on F.Cu "F.Cu-/HDMI/TMDS_D1+" (solid, remove dead copper, pour order 32094): -42.783,11.322 -42.778,11.29 -42.77,11.229 -42.78,11.206 -42.805,11.197 -42.68,10.884 -42.555,11.197 -42.575,11.202 -42.586,11.215 -42.589,11.257 -42.582,11.29 -42.577,11.322
CON_USB3_D_N on F.Cu "F.Cu-/USB2.0&USB3.0/CON_USB3_D_N" (solid, remove dead copper, pour order 31930): -105.919,13.967 -105.914,14.018 -105.901,14.055 -105.857,14.101 -105.832,14.118 -105.778,14.156 -105.723,14.219 -105.889,14.331 -106.085,14.369 -106.101,14.264 -106.103,14.19 -106.098,14.129 -106.089,13.967
GND on F.Cu "F.Cu-GND-11" (solid, remove dead copper, pour order 31771): -51.015,39.926 -51.02,39.846 -51.032,39.788 -51.056,39.726 -51.082,39.662 -51.106,39.569 -50.91,39.529 -50.714,39.569 -50.754,39.697 -50.77,39.729 -50.801,39.807 -50.815,39.926
CON_USB3_SSRX_P on F.Cu "F.Cu-/USB2.0&USB3.0/CON_USB3_SSRX_P-1" (solid, remove dead copper, pour order 31922): -114.501,15.853 -114.506,15.802 -114.519,15.765 -114.563,15.719 -114.588,15.702 -114.642,15.664 -114.697,15.601 -114.531,15.489 -114.335,15.451 -114.319,15.556 -114.317,15.63 -114.322,15.691 -114.331,15.853
GND on F.Cu "F.Cu-GND-10" (solid, remove dead copper, pour order 31340): -49.03,8.255 -49.028,8.229 -49.029,8.149 -49.045,8.118 -49.08,8.105 -48.93,6.804 -48.78,8.105 -48.803,8.11 -48.819,8.122 -48.833,8.167 -48.832,8.229 -48.83,8.255
TMDS_CK- on F.Cu "F.Cu-/HDMI/TMDS_CK-" (solid, remove dead copper, pour order 31328): -46.533,8.255 -46.531,8.227 -46.531,8.148 -46.546,8.117 -46.58,8.105 -46.43,6.804 -46.28,8.105 -46.303,8.11 -46.319,8.122 -46.332,8.167 -46.329,8.227 -46.327,8.255
+3V3 on F.Cu "F.Cu-+3V3-7" (solid, remove dead copper, pour order 31618): -108.295,52.885 -108.335,52.878 -108.408,52.869 -108.434,52.88 -108.445,52.91 -109.221,52.76 -108.445,52.61 -108.44,52.632 -108.428,52.645 -108.385,52.651 -108.335,52.642 -108.295,52.635
TMDS_D0+ on F.Cu "F.Cu-/HDMI/TMDS_D0+" (solid, remove dead copper, pour order 32103): -44.087,9.673 -44.092,9.705 -44.1,9.766 -44.09,9.789 -44.065,9.797 -44.19,10.111 -44.315,9.797 -44.295,9.793 -44.284,9.78 -44.281,9.738 -44.288,9.705 -44.293,9.673
HSIO_8_TX- on F.Cu "F.Cu-/LattePanda Module/HSIO_8_TX-" (solid, remove dead copper, pour order 31901): -62.84,29.651 -62.849,29.486 -62.855,29.385 -62.836,29.241 -62.64,29.279 -62.474,29.391 -62.545,29.473 -62.563,29.488 -62.618,29.548 -62.633,29.59 -62.639,29.651
DDC_SDA on F.Cu "F.Cu-/HDMI/DDC_SDA" (solid, remove dead copper, pour order 31564): -50.375,10.493 -50.464,10.499 -50.571,10.522 -50.634,10.548 -50.686,10.585 -50.712,10.615 -50.728,10.65 -50.966,10.39 -50.728,10.13 -50.689,10.192 -50.615,10.241 -50.499,10.276 -50.375,10.287
CON_USB2_D_N on F.Cu "F.Cu-/USB2.0&USB3.0/CON_USB2_D_N-1" (solid, remove dead copper, pour order 32046): -65.551,15.017 -65.567,15.131 -65.583,15.198 -65.613,15.333 -65.625,15.472 -65.75,15.456 -65.798,15.142 -65.769,15.138 -65.748,15.125 -65.726,15.083 -65.721,15.023 -65.721,15.017
CON_USB3_SSTX_P on F.Cu "F.Cu-/USB2.0&USB3.0/CON_USB3_SSTX_P" (solid, remove dead copper, pour order 31925): -120.521,16.173 -120.526,16.122 -120.539,16.085 -120.583,16.039 -120.608,16.022 -120.662,15.984 -120.717,15.921 -120.551,15.809 -120.355,15.771 -120.339,15.876 -120.337,15.95 -120.342,16.011 -120.351,16.173
GND on F.Cu "F.Cu-GND-9" (solid, remove dead copper, pour order 31592): -93.375,35.85 -93.381,35.779 -93.399,35.694 -93.425,35.627 -93.463,35.569 -93.497,35.538 -93.538,35.517 -93.555,35.512 -93.275,35.289 -92.995,35.512 -93.062,35.545 -93.116,35.612 -93.157,35.718 -93.175,35.85
{\P\W\R\_\L\E\D\}\{\s\l\a\s\h\}\{PSON} on F.Cu "F.Cu-/~{PWR_LED}{slash}~{PSON}-1" (solid, remove dead copper, pour order 31617): -131.645,87.19 -131.624,87.323 -131.597,87.397 -131.559,87.465 -131.523,87.506 -131.481,87.535 -131.46,87.543 -131.72,87.781 -131.98,87.543 -131.914,87.503 -131.856,87.424 -131.811,87.305 -131.795,87.19
GND on F.Cu "F.Cu-GND-8" (solid, remove dead copper, pour order 31748): -116.176,52.41 -116.093,52.405 -116.033,52.393 -115.974,52.371 -115.91,52.347 -115.819,52.324 -115.779,52.52 -115.819,52.716 -115.944,52.676 -115.98,52.658 -116.057,52.624 -116.176,52.61
GND on F.Cu "F.Cu-GND-7" (solid, remove dead copper, pour order 31793): -25.065,33.794 -25.06,33.875 -25.048,33.932 -25.024,33.994 -24.998,34.058 -24.974,34.151 -25.17,34.191 -25.366,34.151 -25.326,34.023 -25.31,33.991 -25.279,33.913 -25.265,33.794
CON_USB4_SSRX_N on F.Cu "F.Cu-/USB2.0&USB3.0/CON_USB4_SSRX_N" (solid, remove dead copper, pour order 31208): 18 vertices, not listed, extent -115.13,11.533 -114.183,12.48
GND on F.Cu "F.Cu-GND-6" (solid, remove dead copper, pour order 31682): -115.845,71.11 -115.871,71.108 -115.951,71.109 -115.982,71.125 -115.995,71.16 -116.771,71.01 -115.995,70.86 -115.99,70.883 -115.978,70.899 -115.933,70.913 -115.871,70.912 -115.845,70.91
CC1 on F.Cu "F.Cu-/PSU/CC1" (solid, remove dead copper, pour order 31473): -13.295,6.19 -13.364,6.195 -13.447,6.213 -13.52,6.239 -13.585,6.278 -13.623,6.313 -13.65,6.355 -13.66,6.385 -13.886,6.09 -13.66,5.795 -13.625,5.865 -13.554,5.923 -13.443,5.968 -13.308,5.99 -13.295,5.99
+5V on F.Cu "F.Cu-+5V-1" (solid, remove dead copper, pour order 31302): -87.978,80.989 -87.909,81.066 -87.835,81.152 -87.749,81.233 -87.653,81.293 -87.601,81.31 -87.546,81.315 -87.659,81.591 -88.01,81.629 -88.008,81.556 -88.043,81.479 -88.123,81.391 -88.196,81.328 -88.261,81.272
{\P\W\R\_\L\E\D\}\{\s\l\a\s\h\}\{PSON} on F.Cu "F.Cu-/~{PWR_LED}{slash}~{PSON}" (solid, remove dead copper, pour order 31988): -70.727,34.487 -70.675,34.532 -70.631,34.559 -70.552,34.585 -70.48,34.605 -70.389,34.654 -70.499,34.821 -70.666,34.931 -70.721,34.821 -70.735,34.768 -70.762,34.688 -70.789,34.644 -70.833,34.593
+3V3 on F.Cu "F.Cu-+3V3-6" (solid, remove dead copper, pour order 31621): -108.295,70.885 -108.335,70.878 -108.408,70.869 -108.434,70.88 -108.445,70.91 -109.221,70.76 -108.445,70.61 -108.44,70.632 -108.428,70.645 -108.385,70.651 -108.335,70.642 -108.295,70.635
HSO- on F.Cu "F.Cu-/Gigabit Ethernet/HSO-" (solid, remove dead copper, pour order 32072): -91.956,31.987 -91.953,31.965 -91.95,31.915 -91.96,31.897 -91.984,31.89 -91.935,31.489 -91.835,31.482 -91.833,31.648 -91.808,31.816 -91.786,31.987
GND on F.Cu "F.Cu-GND-5" (solid, remove dead copper, pour order 31765): -14.515,39.926 -14.52,39.846 -14.532,39.788 -14.556,39.726 -14.582,39.662 -14.606,39.569 -14.41,39.529 -14.214,39.569 -14.254,39.697 -14.27,39.729 -14.301,39.807 -14.315,39.926
Net-(U16-BOOST) on F.Cu "F.Cu-Net-(U16-BOOST)" (solid, remove dead copper, pour order 31314): -4.63,25.261 -4.647,25.286 -4.692,25.355 -4.73,25.433 -4.738,25.47 -4.733,25.501 -4.711,25.524 -4.67,25.537 -5.283,25.799 -5.421,25.498 -5.293,25.479 -5.186,25.429 -5.095,25.349 -5.03,25.261
GND on F.Cu "F.Cu-GND-4" (solid, remove dead copper, pour order 31431): 42 vertices, not listed, extent -98.179,92.79 -96.851,93.79
+3V3 on F.Cu "F.Cu-+3V3-5" (solid, remove dead copper, pour order 31580): -91.745,35.43 -91.83,35.436 -91.931,35.457 -91.996,35.483 -92.052,35.52 -92.08,35.552 -92.098,35.589 -92.336,35.33 -92.098,35.07 -92.059,35.132 -91.984,35.182 -91.868,35.218 -91.745,35.23
PWR_EN on F.Cu "F.Cu-/PSU/PWR_EN-1" (solid, remove dead copper, pour order 31636): -77.88,10.65 -77.874,10.72 -77.855,10.803 -77.829,10.863 -77.792,10.912 -77.759,10.937 -77.72,10.951 -77.71,10.953 -77.98,11.191 -78.25,10.953 -78.185,10.926 -78.133,10.867 -78.095,10.769 -78.08,10.65
Net-(D26-A) on F.Cu "F.Cu-Net-(D26-A)" (solid, remove dead copper, pour order 31415): -85.76,82.14 -85.754,82.079 -85.747,82.005 -85.749,81.931 -85.775,81.874 -85.8,81.856 -85.835,81.848 -85.56,81.589 -85.285,81.848 -85.317,81.855 -85.341,81.869 -85.368,81.918 -85.373,82.003 -85.366,82.079 -85.36,82.14
Net-(D25-A2) on F.Cu "F.Cu-Net-(D25-A2)" (solid, remove dead copper, pour order 31644): -108.1,90.13 -108.106,90.06 -108.125,89.977 -108.151,89.917 -108.188,89.868 -108.221,89.843 -108.26,89.829 -108.27,89.827 -108,89.589 -107.73,89.827 -107.795,89.854 -107.847,89.913 -107.885,90.011 -107.9,90.13
Net-(U15-FB) on F.Cu "F.Cu-Net-(U15-FB)" (solid, remove dead copper, pour order 31382): -21.13,21.01 -21.047,21.017 -20.956,21.025 -20.863,21.022 -20.782,20.998 -20.749,20.974 -20.725,20.94 -20.539,21.21 -20.725,21.48 -20.771,21.428 -20.845,21.4 -20.959,21.396 -21.047,21.403 -21.13,21.41
+3V3 on F.Cu "F.Cu-+3V3-4" (solid, remove dead copper, pour order 31388): -106.85,28.08 -106.712,28.102 -106.534,28.129 -106.457,28.123 -106.425,28.11 -106.4,28.09 -106.289,28.4 -106.555,28.629 -106.562,28.587 -106.577,28.553 -106.626,28.508 -106.704,28.483 -106.821,28.479 -106.85,28.48
I2C3_SCL on F.Cu "F.Cu-/GPIO/I2C3_SCL" (solid, remove dead copper, pour order 31993): -82.825,84.274 -82.82,84.342 -82.808,84.393 -82.77,84.467 -82.734,84.532 -82.704,84.631 -82.9,84.671 -83.096,84.631 -83.057,84.515 -83.03,84.467 -82.991,84.392 -82.979,84.341 -82.975,84.274
MDI1- on F.Cu "F.Cu-/Gigabit Ethernet/MDI1-" (solid, remove dead copper, pour order 32114): -92.768,27.107 -92.768,27.109 -92.758,27.162 -92.741,27.184 -92.709,27.19 -92.735,27.591 -92.835,27.6 -92.844,27.405 -92.865,27.258 -92.884,27.107
TMDS_D1- on F.Cu "F.Cu-/HDMI/TMDS_D1-" (solid, remove dead copper, pour order 32087): -43.283,11.322 -43.278,11.29 -43.27,11.229 -43.28,11.206 -43.305,11.197 -43.18,10.884 -43.055,11.197 -43.075,11.202 -43.086,11.215 -43.089,11.257 -43.082,11.29 -43.077,11.322
MDI3- on F.Cu "F.Cu-/Gigabit Ethernet/MDI3-" (solid, remove dead copper, pour order 32111): -90.502,28.507 -90.504,28.507 -90.557,28.517 -90.579,28.534 -90.585,28.566 -90.986,28.54 -90.995,28.44 -90.8,28.431 -90.654,28.41 -90.502,28.391
DDI_B_DDC_SCL on F.Cu "F.Cu-/HDMI/DDI_B_DDC_SCL" (solid, remove dead copper, pour order 31260): -51.614,21.485 -51.62,21.405 -51.639,21.309 -51.665,21.233 -51.704,21.165 -51.738,21.127 -51.78,21.1 -51.799,21.092 -51.51,20.446 -51.221,21.092 -51.288,21.133 -51.344,21.21 -51.386,21.33 -51.406,21.485
HSIO_3_TX- on F.Cu "F.Cu-/LattePanda Module/HSIO_3_TX-" (solid, remove dead copper, pour order 31546): -104.837,58.906 -104.919,58.96 -104.962,59.007 -105.001,59.063 -105.031,59.126 -105.051,59.195 -105.06,59.301 -105.341,59.15 -105.378,58.84 -105.272,58.849 -105.112,58.825 -104.904,58.761 -104.837,58.736
SOC_UART0_RX on F.Cu "F.Cu-/GPIO/SOC_UART0_RX" (solid, remove dead copper, pour order 31996): -62.507,72.253 -62.552,72.305 -62.579,72.349 -62.605,72.428 -62.625,72.5 -62.674,72.591 -62.841,72.481 -62.951,72.314 -62.841,72.259 -62.788,72.245 -62.708,72.218 -62.664,72.191 -62.613,72.147
Net-(Q7-G) on F.Cu "F.Cu-Net-(Q7-G)" (solid, remove dead copper, pour order 31497): -31.907,7.223 -31.909,7.133 -31.925,7.026 -31.941,6.974 -31.964,6.929 -31.997,6.892 -32.04,6.869 -31.78,6.632 -31.52,6.869 -31.579,6.907 -31.621,6.978 -31.647,7.09 -31.653,7.223
HSIO_2_TX- on F.Cu "F.Cu-/LattePanda Module/HSIO_2_TX-" (solid, remove dead copper, pour order 31919): -101.103,43.759 -101.052,43.754 -101.015,43.741 -100.969,43.697 -100.952,43.672 -100.914,43.618 -100.851,43.563 -100.739,43.729 -100.701,43.925 -100.806,43.941 -100.88,43.943 -100.941,43.938 -101.103,43.929
+3V3 on F.Cu "F.Cu-+3V3-3" (solid, remove dead copper, pour order 31836): -51.6,16.016 -51.605,15.938 -51.617,15.882 -51.643,15.817 -51.671,15.753 -51.696,15.659 -51.5,15.619 -51.304,15.659 -51.345,15.791 -51.357,15.817 -51.387,15.896 -51.4,16.016